# Altium PCB FCStellarisBRD.PcbDoc
Units mm, origin at the board's own origin, x right, y up, seen from the top; angles counter-clockwise.
Board outline 50.04 x 50.04 mm, 2 copper layers (Top Layer, Bottom Layer); 69 components, 79 nets, 282 pads, 0 vias.
Unrouted connection lines stored in the file: 187.
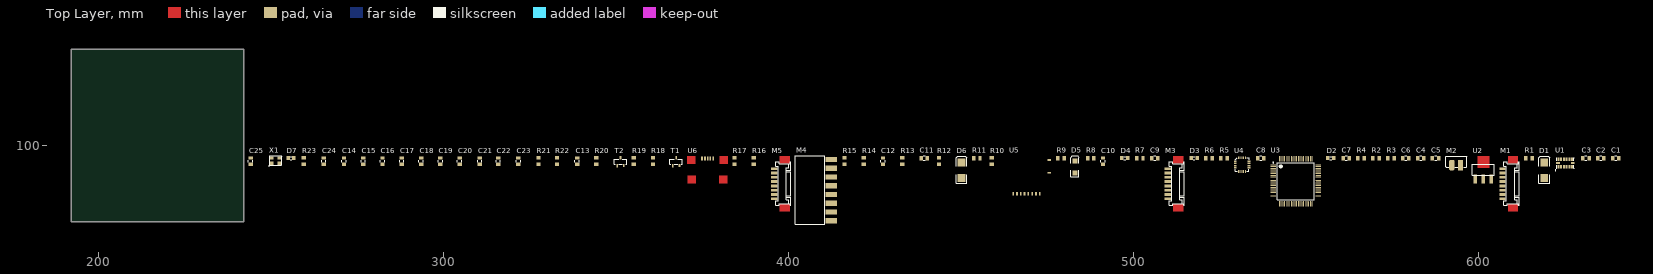
[diagram p0: Top Layer view]
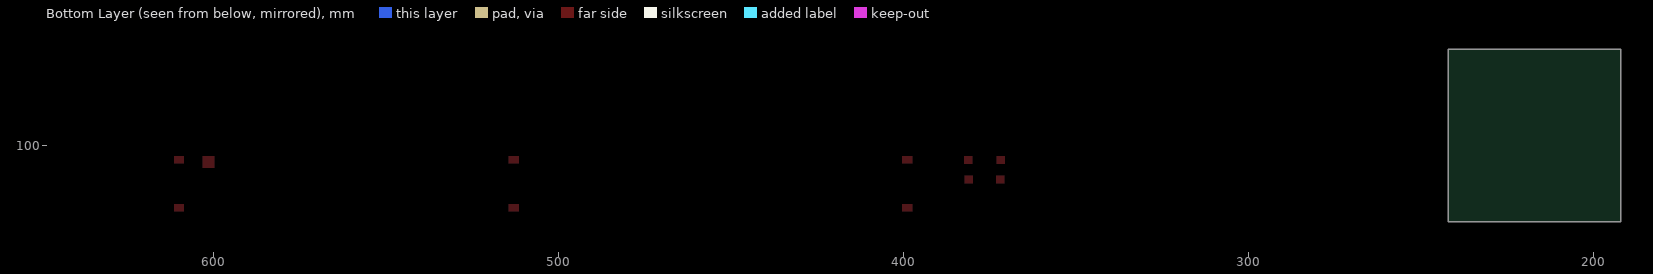
[diagram p1: Bottom Layer view, seen from below]

## Layer stack, top to bottom
Top Layer: signal copper 0.0356
Dielectric: dielectric 0.32, FR-4, Dk 4.8
Bottom Layer: signal copper 0.0356

## Board outline
192.151,77.851 242.189,77.851 242.189,127.889 192.151,127.889

## Design rules (kind name [scope] priority, off if disabled: settings)
Clearance [All] p1: gap=0.254
PolygonConnect [All] p1: connectstyle=Relief reliefconductorwidth=0.254 reliefentries=4 polygonreliefangle="90 Angle"
RoomDefinition FCStellarisSCH [InComponentClass('FCStellarisSCH')] p1: confinementstyle=ConfineIn formatcopy=TRUE lockcomponents=FALSE outline 243.332,76.835 648.589,76.835 648.589,99.695 243.332,99.695
RoutingVias [All] p1: holewidth=0.711 width=1.27 viastyle="Through Hole" minholewidth=0.711 minwidth=1.27 maxholewidth=0.711 maxwidth=1.27
SilkscreenOverComponentPads [All] p1: minsilkscreentomaskgap=0.254
SolderMaskExpansion [All] p1: expansion=0.102
Width [All] p1: maxlimit=0.254 minlimit=0.254 preferedwidth=0.254
27 further rules are at their usual default settings.

## Components (designator, comment, footprint, x,y, rotation, side; value= is the part's Value field where it differs from the comment)
C1 "1uF" "Capacitor 0805" 639.826,96.266 r0 top
C2 "100nF" "Capacitor 0805" 635.508,96.266 r0 top
C3 "100nF" "Capacitor 0805" 631.19,96.266 r0 top
C4 "22uF" "Capacitor 0805" 583.311,96.266 r0 top
C5 "100nF" "Capacitor 0805" 587.629,96.266 r0 top
C6 "220nF" "Capacitor 0805" 578.993,96.266 r0 top
C7 "4.7uF" "Capacitor 0805" 561.721,96.266 r0 top
C8 "10nF" "Capacitor 0805" 536.956,96.266 r0 top
C9 "470nF" "Capacitor 0805" 506.222,96.266 r0 top
C10 "100nF" "Capacitor 0805" 491.236,95.377 r90 top
C11 "100nF" "Capacitor 0805" 439.42,96.266 r0 top
C12 "100nF" "Capacitor 0805" 427.482,95.377 r90 top
C13 "100nF" "Capacitor 0805" 338.836,95.377 r90 top
C14 "100nF" "Capacitor 0805" 271.272,95.377 r90 top
C15 "100nF" "Capacitor 0805" 276.86,95.377 r90 top
C16 "100nF" "Capacitor 0805" 282.448,95.377 r90 top
C17 "100nF" "Capacitor 0805" 288.036,95.377 r90 top
C18 "100nF" "Capacitor 0805" 293.624,95.377 r90 top
C19 "100nF" "Capacitor 0805" 299.212,95.377 r90 top
C20 "100nF" "Capacitor 0805" 304.8,95.377 r90 top
C21 "100nF" "Capacitor 0805" 310.642,95.377 r90 top
C22 "100nF" "Capacitor 0805" 315.976,95.377 r90 top
C23 "100nF" "Capacitor 0805" 321.818,95.377 r90 top
C24 "18pF" "Capacitor 0805" 265.43,95.377 r90 top
C25 "18pF" "Capacitor 0805" 244.221,95.377 r90 top
D1 "D Schottky" SMB 619.125,92.71 r90 top
D2 "LED1" led0805 557.276,96.266 r0 top
D3 "LED1" led0805 517.652,96.266 r0 top
D4 "LED1" led0805 497.586,96.266 r0 top
D5 "LED POWER" 3.2X1.6X1.1 483.108,93.726 r90 top
D6 "D Schottky" SMB 450.215,92.71 r90 top
D7 "USB_UP_LED" led0805 255.905,96.266 r0 top
M1 "MOTOR OUTPUT" "Molex8 1.25 pitch Housing SMD" 607.06,84.455 r90 top
M2 "Conector 2x1" Con256M2x1 592.328,94.234 r0 top
M3 "RADIO" "Molex8 1.25 pitch Housing SMD" 510.032,84.455 r90 top
M4 "COLINKEX" "PinHead8 2.54mm" 412.496,78.105 r90 top
M5 "DISPLAY NOKIA6100" "Molex8 1.25 pitch Housing SMD" 395.986,84.455 r90 top
R1 "4k7" "Resistor 0805" 615.95,96.266 r0 top
R2 "10k" "Resistor 0805" 571.627,96.266 r0 top
R3 "2k2" "Resistor 0805" 575.945,96.266 r0 top
R4 "4k7" "Resistor 0805" 567.309,96.266 r0 top
R5 "470R" "Resistor 0805" 527.558,96.266 r0 top
R6 "10k" "Resistor 0805" 523.24,96.266 r0 top
R7 "470R" "Resistor 0805" 503.174,96.266 r0 top
R8 "470R" "Resistor 0805" 488.95,96.266 r0 top
R9 "10k" "Resistor 0805" 480.314,96.266 r0 top
R10 "470R" "Resistor 0805" 458.978,96.647 r90 top
R11 "12k" "Resistor 0805" 455.93,96.266 r0 top
R12 "4k7" "Resistor 0805" 443.738,96.647 r90 top
R13 "47k" "Resistor 0805" 433.07,96.647 r90 top
R14 "10k" "Resistor 0805" 421.894,96.647 r90 top
R15 "100k" "Resistor 0805" 416.306,96.647 r90 top
R16 "100R" "Resistor 0805" 390.017,96.647 r90 top
R17 "33R" "Resistor 0805" 384.429,96.647 r90 top
R18 "33R" "Resistor 0805" 360.807,96.647 r90 top
R19 "10k" "Resistor 0805" 355.219,96.647 r90 top
R20 "1k5" "Resistor 0805" 344.424,96.647 r90 top
R21 "10k" "Resistor 0805" 327.66,96.647 r90 top
R22 "2k2" "Resistor 0805" 332.994,96.647 r90 top
R23 "560R" "Resistor 0805" 259.588,96.647 r90 top
T1 "MOSFET_NPN" "SOT23 - 123" 366.522,93.98 r0 top
T2 "BC857B" "SOT23 - 213" 350.393,93.98 r0 top
U1 "LSM303DLHC" LGA-14 625.221,94.869 r0 top
U2 "AMS1111" AMS1111 598.932,89.789 r0 top
U3 "LPC175x" SQFP50P1400X1400-80L 547.116,89.535 r0 top
U4 "L3G4200D" LGA16 529.59,95.377 r0 top
U5 "uSD" "MICRO SDCARD" 470.408,91.948 r0 top
U6 "MINI_USB_B" USB_MINI_B 373.126,89.789 r0 top
X1 "12MHz" XTAL-3.2x2.5 250.952,96.266 r0 top

## Footprints (in the part's own frame and the unit in brackets; to place one, negate y for a bottom-side part, rotate by r counter-clockwise, add the part's x,y. Pads: shape width x height; smd on the part's side, far side on the other; paste and mask are expansions set on the pad)
3.2X1.6X1.1 [mm] "SMT LED; 2 Flat Leads"
  rect 1.5x1.5 smd: 1(-1.75,0) 2(1.75,0)
  silkscreen extent -2.9,-1.15 3.2,1.15
AMS1111 [mm]
  rect 1x2.5 smd mask+0.102: 1(0.203,0.406)
  rect 1x2.5 smd: 2(2.56,0.406) 3(4.902,0.406)
  Top Layer region: 0.864,3.607 4.267,3.607 4.267,7.112 0.864,7.112
  silkscreen extent -0.61,1.58 5.66,4.68, body extent -0.68,-0.36 5.82,6.6, height 1.7
"Capacitor 0805" [mm]
  rect 1x1.25 smd: 1(-0.898,0) 2(0.924,0)
  silkscreen extent -0.3,-0.61 0.3,0.64, body extent -0.77,-0.43 0.83,0.43, height 0.8
Con256M2x1 [mm]
  rrect50% 1.5x3 smd: 1(0,0)
  rect 1.5x3 smd: 2(2.56,0)
  silkscreen extent -1.8,-0.6 4.4,2.6
led0805 [mm]
  rect 1x1.2 smd: 1(-0.852,0) 2(0.852,0)
  silkscreen extent -0.25,-0.43 0.23,0.46, body extent -1.01,-0.46 1.05,0.45, height 0.85
LGA16 [mm]
  rect 0.8x0.4 smd: 1(0,0) 2(0,-0.65) 3(0,-1.3) 4(0,-1.95) 9(3.975,-1.95) 10(3.975,-1.3) 11(3.975,-0.65) 12(3.975,0)
  rect 0.4x0.8 smd: 5(1,-2.975) 6(1.65,-2.975) 7(2.3,-2.975) 8(2.95,-2.975) 13(2.95,1.025) 14(2.3,1.025) 15(1.65,1.025) 16(1,1.025)
  silkscreen extent -0.03,-2.97 3.99,1.04, body extent -0.02,-2.97 3.98,1.03, height 0.92
LGA-14 [mm]
  rect 0.55x1.05 smd: 1(-2,-1.122) 2(-1.2,-1.122) 3(-0.4,-1.122) 4(0.4,-1.122) 5(1.2,-1.122) 6(2,-1.122) 8(2,1.122) 9(1.2,1.122) 10(0.4,1.122) 11(-0.4,1.122) 12(-1.2,1.122) 13(-2,1.122)
  rect 1.05x0.55 smd: 7(2.134,0) 14(-2.108,0)
  silkscreen extent -2.95,-2.22 2.68,1.5, body extent -2.5,-1.47 2.5,1.53, height 1.03
"MICRO SDCARD" [mm]
  rect 0.5x1 smd: 1(2.515,-6.045) 2(1.397,-6.045) 3(0.305,-6.045) 4(-0.787,-6.045) 5(-1.88,-6.045) 6(-2.972,-6.045) 7(-4.089,-6.045) 8(-5.182,-6.045)
  rect 1x0.5 smd: 9(5.258,3.759) 10(5.207,0.076)
  body extent -6.57,-6.33 5.38,5.07, height 1.44
"Molex8 1.25 pitch Housing SMD" [mm] "PN 532610871"
  rect 0.8x1.8 smd: 1(0,0) 2(1.25,0) 3(2.5,0) 4(3.75,0) 5(5,0) 6(6.25,0) 7(7.5,0) 8(8.75,0)
  Top Layer region: -3.6,-4.5 -1.5,-4.5 -1.5,-1.5 -3.6,-1.5
  Top Layer region: 10.3,-4.5 12.4,-4.5 12.4,-1.5 10.3,-1.5
  silkscreen extent -1.8,-4.8 10.7,-0.4, body extent -3.17,-4.8 11.97,0.4, height 3.4
"PinHead8 2.54mm" [mm]
  rect 1.5x3.3 smd: 1(0,0) 2(2.54,0) 3(5.08,0) 4(7.62,0) 5(10.16,0) 6(12.7,0) 7(15.24,0) 8(17.78,0)
  silkscreen extent -0.97,1.88 18.85,10.39, body extent -0.97,1.88 18.85,10.41, height 2.54
"Resistor 0805" [mm]
  rect 1x1.25 smd: 1(-0.33,0) 2(-2.184,0)
  body extent -2.25,-0.62 -0.25,0.62, height 0.78
SMB [mm] "DO-214-AA/SMB; 2 C-Bend Leads; Body 5.3 x 3.6 mm, inc. leads (LxW)"
  rect 2.3x2.3 smd: 1(-2.25,0) 2(2.25,0)
  silkscreen extent -3.8,-1.55 4.1,1.55
"SOT23 - 123" [mm]
  rect 0.5x1 smd: 1(0.051,0.127) 2(1.975,0.152) 3(1.025,2.373)
  silkscreen extent -0.8,0.5 2.8,2, body extent -0.5,-0.02 2.54,2.46, height 1.21
"SOT23 - 213" [mm]
  rect 0.5x1 smd: 1(1.975,0.152) 2(0.051,0.127) 3(1.025,2.373)
  silkscreen extent -0.8,0.5 2.8,2, body extent -0.5,-0.02 2.54,2.46, height 1.21
SQFP50P1400X1400-80L [mm] "Shrink QFP, 80-Leads, Body 12x12mm, Pitch 0.5mm, IPC High Density"
  oval 1.55x0.25 smd: 1(-6.525,4.75) 2(-6.525,4.25) 3(-6.525,3.75) 4(-6.525,3.25) 5(-6.525,2.75) 6(-6.525,2.25) 7(-6.525,1.75) 8(-6.525,1.25) 9(-6.525,0.75) 10(-6.525,0.25) 11(-6.525,-0.25) 12(-6.525,-0.75) 13(-6.525,-1.25) 14(-6.525,-1.75) 15(-6.525,-2.25) 16(-6.525,-2.75) 17(-6.525,-3.25) 18(-6.525,-3.75) 19(-6.525,-4.25) 20(-6.525,-4.75) 41(6.525,-4.75) 42(6.525,-4.25) 43(6.525,-3.75) 44(6.525,-3.25) 45(6.525,-2.75) 46(6.525,-2.25) 47(6.525,-1.75) 48(6.525,-1.25) 49(6.525,-0.75) 50(6.525,-0.25) 51(6.525,0.25) 52(6.525,0.75) 53(6.525,1.25) 54(6.525,1.75) 55(6.525,2.25) 56(6.525,2.75) 57(6.525,3.25) 58(6.525,3.75) 59(6.525,4.25) 60(6.525,4.75)
  oval 0.25x1.55 smd: 21(-4.75,-6.525) 22(-4.25,-6.525) 23(-3.75,-6.525) 24(-3.25,-6.525) 25(-2.75,-6.525) 26(-2.25,-6.525) 27(-1.75,-6.525) 28(-1.25,-6.525) 29(-0.75,-6.525) 30(-0.25,-6.525) 31(0.25,-6.525) 32(0.75,-6.525) 33(1.25,-6.525) 34(1.75,-6.525) 35(2.25,-6.525) 36(2.75,-6.525) 37(3.25,-6.525) 38(3.75,-6.525) 39(4.25,-6.525) 40(4.75,-6.525) 61(4.75,6.525) 62(4.25,6.525) 63(3.75,6.525) 64(3.25,6.525) 65(2.75,6.525) 66(2.25,6.525) 67(1.75,6.525) 68(1.25,6.525) 69(0.75,6.525) 70(0.25,6.525) 71(-0.25,6.525) 72(-0.75,6.525) 73(-1.25,6.525) 74(-1.75,6.525) 75(-2.25,6.525) 76(-2.75,6.525) 77(-3.25,6.525) 78(-3.75,6.525) 79(-4.25,6.525) 80(-4.75,6.525)
  silkscreen extent -6.65,-5.35 5.35,5.55, body extent -7.13,-7.09 7.07,7.11, height 1.63
USB_MINI_B [mm]
  rect 0.5x1.2 smd: 1(1.93,6.35) 2(2.743,6.35) 3(3.531,6.35) 4(4.318,6.35) 5(5.131,6.35)
  Top Layer region: 6.934,4.699 9.373,4.699 9.373,7.061 6.934,7.061
  Top Layer region: -2.413,4.775 0.025,4.775 0.025,7.137 -2.413,7.137
  Top Layer region: -2.311,-0.864 0.127,-0.864 0.127,1.499 -2.311,1.499
  Top Layer region: 6.883,-0.864 9.322,-0.864 9.322,1.499 6.883,1.499
  body extent -1.82,-2.55 8.88,6.65, height 3.95
XTAL-3.2x2.5 [mm]
  rect 1x0.9 smd: 1(-0.584,-1.499) 2(1.575,-1.499) 3(1.575,0.051) 4(-0.584,0.051)
  silkscreen extent -1.49,-2.35 2.24,0.66

## Part data
C1 C2 C3 C4 C5 C6 C7 C8 C9 C10 C11 C12 C13 C14 C15 C16 C17 C18 C19 C20 C21 C22 C23 C24 C25: library part Capacitor, "Capacitor"
D1 D6: "Schottky Diode"
D2 D3: "Typical RED GaAs LED"
D4 D5: library part LED2, "Typical RED, GREEN, YELLOW, AMBER GaAs LED"
D7: library part LED1, "Typical RED GaAs LED"
M1 M3 M5: library part conector127-8x1
M2: library part conector254-2x1
M4: library part JTAG_COLINKEX
R1 R2 R3 R4 R5 R6 R7 R8 R9 R10 R11 R12 R13 R14 R15 R16 R17 R18 R19 R20 R21 R22 R23: library part Resisitor, "Resisitor"
U1: "3-axis Compass and accelerometer I2C Interface"
U2: "3.3V Linear Regulator"
U4: "Digital Gyroscope 3-axis"
U5: library part MICROSD
X1: library part XTAL4PIN

## Nets (pads, with @x,y where several pads share a name; then routed paths per layer and width w, separated by ;. In a path a pad name is that pad's centre, name@x,y a point inside that pad or via, vN(x,y) a via of type N, cw(c..) or ccw(c..) an arc to the next point about the centre after c; other vN are vias at no path point)
3V3: C1.2 C2.1 C10.1 C13.2 C14.2 C15.2 C16.2 C17.2 C18.2 C19.2 C20.2 C21.2 C22.2 C23.2 D2.1 D4.1 D5.1 D7.1 M3.1 M4.1 M5.7 R1.1 R4.1 R9.1 R11.1 R21.2 T2.3 U1.1 U1.14 U2.2 U3.8 U3.10 U3.16 U3.21 U3.34 U3.42 U3.56 U3.67 U3.77 U4.1 U4.15 U4.16 U5.4 U5.10
ACCEL_DRDY: U1.9 U3.40
ACCEL_INT_1: U1.5 U3.39
ACCEL_INT_2: U1.4
CH1: M3.2 U3.52
CH2: M3.3 U3.51
CH3: M3.4 U3.50
CH4: M3.5 U3.41
CH5: M3.6 U3.65
CH6: M3.7 U3.68
CH7: M3.8 U3.44
GND: C1.1 C2.2 C3.2 C4.1 C5.1 C7.2 C8.2 C10.2 C11.1 C12.2 C13.1 C14.1 C15.1 C16.1 C17.1 C18.1 C19.1 C20.1 C21.1 C22.1 C23.1 C24.2 C25.1 M2.2 M4.8 M5.6 R3.2 R6.1 R10.2 R13.1 R15.2 R19.1 T1.2 U1.7 U2.1 U3.9 U3.12 U3.24 U3.33 U3.43 U3.57 U3.66 U3.78 U4.8 U4.9 U4.10 U4.11 U4.12 U4.13 U5.5 U6.5 X1.2 X1.4
GYRO_DRDY: U3.7 U4.6
GYRO_INT_1: U3.6 U4.7
LCD_CLK: M5.2 U3.76
LCD_DI: M5.4 U3.74
LCD_DO: M5.3 U3.75
LCD_LED: R19.2 T1.1 U3.35
LCD_STE: M5.5 U3.73
LED_GND: M5.1 R16.2
LED_IO_1: R8.2 U3.69
LED_IO_2: R7.2 U3.70
LED_IO_3: R5.2 U3.71
MAT0_1: U3.36
MAT1_0: M1.7 U3.28
MAT1_1: M1.8 U3.31
MISO0: U3.46 U5.2
MISO1: U3.62 U4.4
MOSI0: U3.45 U5.6
MOSI1: U3.61 U4.3
NetC6_1: C6.1 U1.12
NetC6_2: C6.2 U1.13
NetC7_1: C7.1 U1.6
NetC8_1: C8.1 C9.1 U4.14
NetC9_2: C9.2 R6.2
NetC12_1: C12.1 D6.1 R14.2 R15.1 U6.1
NetD1_1: D1.1 M2.1
NetD2_2: D2.2 R5.1
NetD3_2: D3.2 R7.1
NetD4_2: D4.2 R8.1
NetD5_2: D5.2 R10.1
NetD7_2: D7.2 R23.2
NetR9_2: R9.2 U3.4
NetR12_2: R12.2 R13.2 U5.9
NetR16_1: R16.1 T1.3
NetR17_2: R17.2 U6.2
NetR18_2: R18.2 R20.1 U6.3
NetR20_2: R20.2 T2.1
NetR21_1: R21.1 R22.2 T2.2
PWM1_1: M1.1 U3.60
PWM1_2: M1.2 U3.59
PWM1_3: M1.3 U3.58
PWM1_4: M1.4 U3.55
PWM1_5: M1.5 U3.54
PWM1_6: M1.6 U3.53
RST: C11.2 M4.6 R11.2 U3.14
RXD0: U3.80
SCK: U5.3
SCK0: U3.47
SCK1: U3.63 U4.2
SD_DETECT: R12.1 U3.32
SSEL0: U3.48 U5.7
SSEL1: U3.64 U4.5
TCK: M4.3 U3.5
TDI: M4.5 U3.2
TDO: M4.4 U3.1
TMS: M4.2 U3.3
TXD0: U3.79
UC_SCL: R1.2 U1.2 U3.38
UC_SDA: R4.2 U1.3 U3.37
USB_CONNECT: R22.1 U3.49
USB_D+: R18.1 U3.22
USB_D-: R17.1 U3.23
USB_UP_LED: R23.1 U3.25
VBAT: C3.1 R2.2 R3.1 U3.17
VBUS: R14.1 U3.18
VCC: C4.2 C5.2 D1.2 D6.2 M5.8 R2.1 U2.3
XT1: C24.1 U3.19 X1.3
XT2: C25.2 U3.20 X1.1
pads on no net: D3.1 M4.7 U1.8 U1.10 U1.11 U3.11 U3.13 U3.15 U3.26 U3.27 U3.29 U3.30 U3.72 U5.1 U5.8 U6.4